# Allegro board lgm_p1_20170524.brd
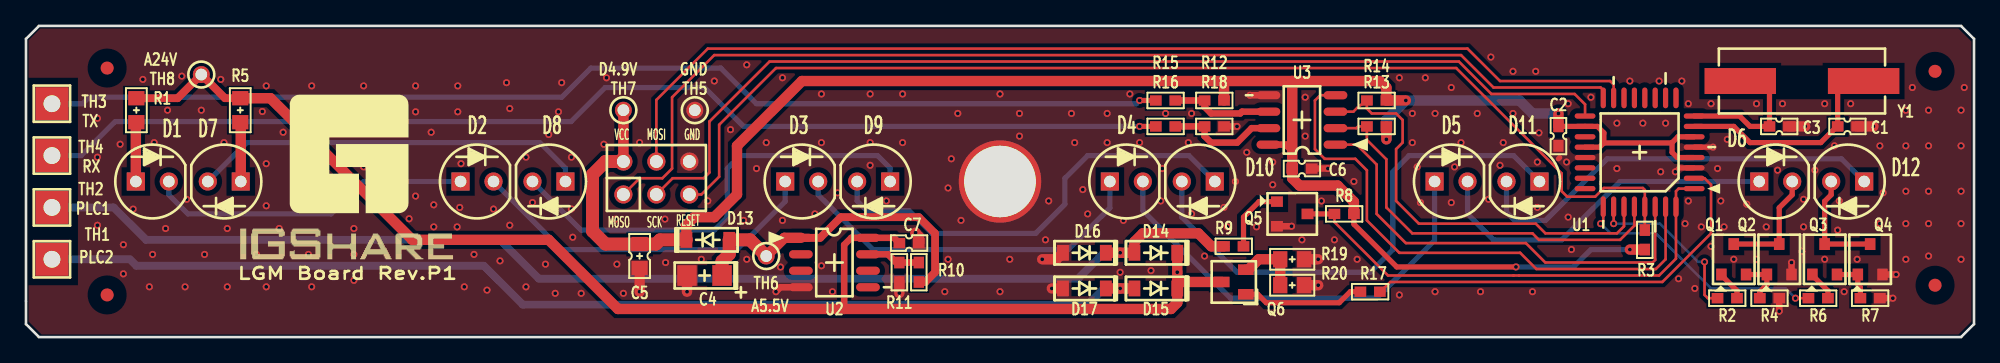
[diagram p0: board, top side]
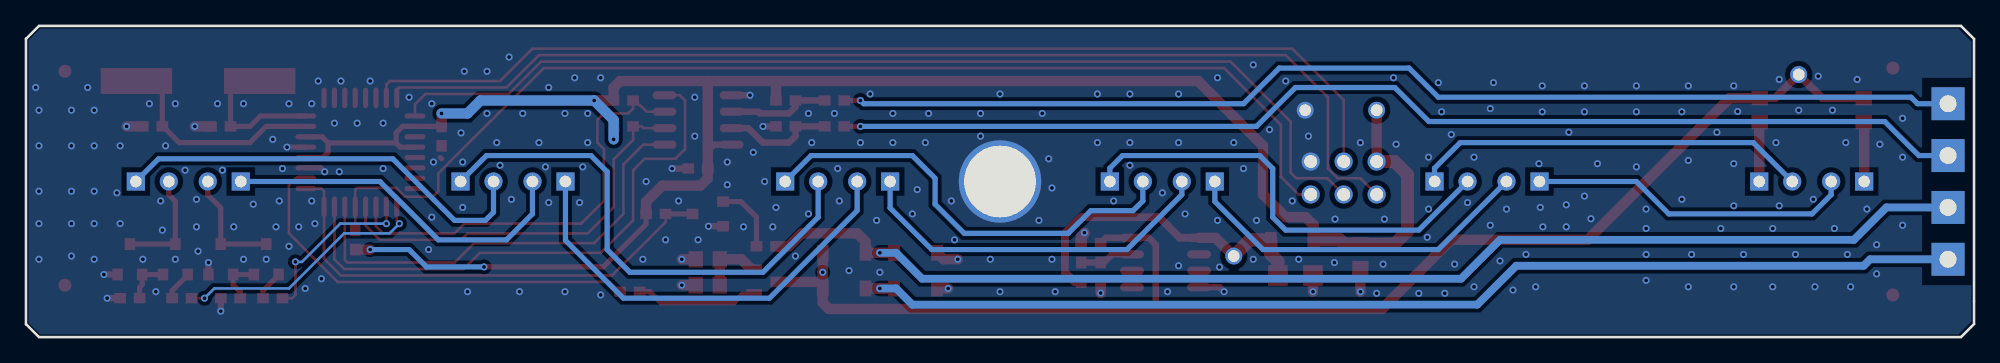
[diagram p1: board, bottom side, seen from below]

Outline 150 x 24 mm; copper layers: TOP, BOTTOM. Coordinates in mm from the lower left corner of the outline.
Outline path: 0,23 0,1 1,0 149,0 150,1 150,23 149,24 1,24 0,23

## Placement (name value [footprint] x y rotation side)
C1  15pF  [CC1608]  140.25 16.25 0 top
C2  100nF  [CC1608]  118 15.5 90 top
C3  15pF  [CC1608]  135 16.25 0 top
C4  TCSCS1C685MAAR  [TC3216]  52.25 4.75 180 top
C5  2.2uF  [CC2012]  47.25 6.25 90 top
C6  100nF  [CC1608]  98.25 13 180 top
C7  680nF  [CC1608]  68 7.25 180 top
D1  T05RC07  [LED_5MM]  11 12 90 top
D2  T05RC07  [LED_5MM]  36 12 90 top
D3  T05RC07  [LED_5MM]  61 12 90 top
D4  T05RC07  [LED_5MM]  86 12 90 top
D5  T05RC07  [LED_5MM]  111 12 90 top
D6  T05RC07  [LED_5MM]  136 12 90 top
D7  T05GC03  [LED_5MM]  14 12 270 top
D8  T05GC03  [LED_5MM]  39 12 270 top
D9  T05GC03  [LED_5MM]  64 12 270 top
D10  T05GC03  [LED_5MM]  89 12 270 top
D11  T05GC03  [LED_5MM]  114 12 270 top
D12  T05GC03  [LED_5MM]  139 12 270 top
D13  MMSD4148T1G  [SOD-123]  52.5 7.5 180 top
D14  MMSD4148T1G  [SOD-123]  87 6.5 0 top
D15  MMSD4148T1G  [SOD-123]  87 3.75 0 top
D16  MMSD4148T1G  [SOD-123]  81.5 6.5 0 top
D17  MMSD4148T1G  [SOD-123]  81.5 3.75 0 top
H1  PCB_HOLE  [HOLE5_5]  75 12 0 top
J2  2.54mm_2Row_Header  [HEADER2X3_2_54MM]  46 11 0 top
NOREF  -  [unnamed]  147 4 0 top
NOREF#2  -  [#2]  12 -48 0 top
NOREF#3  -  [unnamed]  6.25 20.75 0 top
NOREF#4  -  [#2]  0 0 90 top
NOREF#5  -  [#2]  0 2 0 top
NOREF#6  -  [#2]  16 -23 0 top
NOREF#7  -  [unnamed]  147 20.5 0 top
NOREF#8  -  [unnamed]  6.25 3.25 0 top
NOREF#9  -  [#2]  16.5 6 180 bottom
Q1  MMBT3904  [SOT-23]  131.5 6 0 top
Q2  MMBT3904  [SOT-23]  135 6 0 top
Q3  MMBT3904  [SOT-23]  138.5 6 0 top
Q4  MMBT3904  [SOT-23]  142 6 0 top
Q5  MMBT3904  [SOT-23]  97.5 9.5 270 top
Q6  ZXTN04120HFF_SOT23F  [SOT23F]  93 4.25 90 top
R1  1K  [RC2012]  8.5 17.5 90 top
R2  2.7K  [RC1608]  131 3 0 top
R3  10K  [RC1608]  124.65 7.5 270 top
R4  3K  [RC1608]  134.25 3 180 top
R5  1K  [RC2012]  16.5 17.5 90 top
R6  2.7K  [RC1608]  138 3 0 top
R7  3K  [RC1608]  142 3 180 top
R8  47K  [RC1608]  101.5 9.5 0 top
R9  100K  [RC1608]  93 7 0 top
R10  360K  [RC1608]  68.75 5 270 top
R11  100K  [RC1608]  67.25 5 90 top
R12  4.7K  [RC1608]  91.5 18.25 0 top
R13  4.7K  [RC1608]  104 16.25 0 top
R14  4.7K  [RC1608]  104 18.25 0 top
R15  10  [RC1608]  87.75 18.25 0 top
R16  10  [RC1608]  87.75 16.25 0 top
R17  1K  [RC1608]  103.5 3.5 0 top
R18  4.7K  [RC1608]  91.5 16.25 180 top
R19  15  [RC2012]  97.5 6 180 top
R20  15  [RC2012]  97.5 4 180 top
TH1  TH  [TP_51]  2 6 0 top
TH2  TH  [TP_51]  2 10 0 top
TH3  TH  [TP_51]  2 18 0 top
TH4  TH  [TP_51]  2 14 0 top
TH5  GND  [1PIN-HDR]  51.5 17.5 0 top
TH6  A5.5V  [1PIN-HDR]  57 6.25 0 top
TH7  D4.9V  [1PIN-HDR]  46 17.5 0 top
TH8  A24V  [1PIN-HDR]  13.5 20.25 0 top
U1  ATMEGA48V-10AU  [QFP32_7_9_0_8]  124.25 14.25 180 top
U2  LP2951D  [SOP8_3_9_6_1_27]  62.25 5.75 270 top
U3  SN65176BD/DNI  [SOP8_3_9_6_1_27]  98.25 16.75 90 top
Y1  SX-1(8MHz)  [SX-1]  136.75 19.75 180 top

## Library data of the parts
C1-C3 C6 C7 = _CC1608
C4 = _TC3216
C5 = _CC2012
D1-D12 = _LED_5MM
D13-D17 = _SOD-123
H1 = _HOLE5_5
J2 = _HEADER2X3_2_54MM
Q1-Q5 = _SOT-23
Q6 = _SOT23F
R1 R5 R19 R20 = _RC2012
R2-R4 R6-R18 = _RC1608
TH1-TH4 = _TP_51
TH5-TH8 = _1PIN-HDR
U1 = _QFP32_7_9_0_8
U2 U3 = _SOP8_3_9_6_1_27
Y1 = _SX-1

## Footprints (pads in the part's own frame, mm; a bottom-side part is the same pattern mirrored in y, then rotated)
1PIN-HDR
  round 1.3 hole 0.9: 1(0,0)
CC1608
  rect 0.9x0.8 smd: 1(-0.75,0) 2(0.75,0)
CC2012
  rect 1.1x1.25 smd: 1(-0.925,0) 2(0.925,0)
HEADER2X3_2_54MM
  round 1.397 hole 0.991: 1(0,0) 2(0,2.54) 3(2.54,0) 4(2.54,2.54) 5(5.08,0) 6(5.08,2.54)
HOLE5_5
  round 6.35 hole 5.512: 1(0,0)
LED_5MM
  rect 1.397x1.397 hole 0.889: 1(0,2.54)
  round 1.397 hole 0.889: 2(0,0)
QFP32_7_9_0_8
  oval 1.6x0.4 smd: 1(-4.2,2.8) 2(-4.2,2) 3(-4.2,1.2) 4(-4.2,0.4) 5(-4.2,-0.4) 6(-4.2,-1.2) 7(-4.2,-2) 8(-4.2,-2.8) 17(4.2,-2.8) 18(4.2,-2) 19(4.2,-1.2) 20(4.2,-0.4) 21(4.2,0.4) 22(4.2,1.2) 23(4.2,2) 24(4.2,2.8)
  oval 0.4x1.6 smd: 9(-2.8,-4.2) 10(-2,-4.2) 11(-1.2,-4.2) 12(-0.4,-4.2) 13(0.4,-4.2) 14(1.2,-4.2) 15(2,-4.2) 16(2.8,-4.2) 25(2.8,4.2) 26(2,4.2) 27(1.2,4.2) 28(0.4,4.2) 29(-0.4,4.2) 30(-1.2,4.2) 31(-2,4.2) 32(-2.8,4.2)
RC1608
  rect 0.9x0.8 smd: 1(-0.75,0) 2(0.75,0)
RC2012
  rect 1.1x1.25 smd: 1(-0.925,0) 2(0.925,0)
SOD-123
  rect 0.91x1.22 smd: 1(1.65,0) 2(-1.65,0)
SOP8_3_9_6_1_27
  oval 0.635x1.829 smd: 1(-1.905,-2.583) 2(-0.635,-2.583) 3(0.635,-2.583) 4(1.905,-2.583) 5(1.905,2.583) 6(0.635,2.583) 7(-0.635,2.583) 8(-1.905,2.583)
SOT23F
  rect 0.813x1.194 smd: 1(-0.95,-0.925) 2(0.95,-0.925) 3(0,0.925)
SOT-23
  rect 0.813x0.914 smd: 1(-0.95,-1.175) 2(0.95,-1.175) 3(0,1.175)
SX-1
  rect 5.5x2 smd: 1(-4.75,0) 2(4.75,0)
TC3216
  rect 1.5x1.6 smd: 1(-1.35,0) 2(1.35,0)
TP_51
  rect 2.54x2.54 hole 1.295: 1(0,0)
unnamed
  round 1 smd: (0,0)

## Nets
A5.5V: C4.1 D13.2 R10.2 TH6.1 U2.1
A24V: C7.2 D14.1 D15.1 Q6.3 R1.2 R5.2 TH8.1 U2.8
D4.9V: C2.2 C5.2 C6.2 D13.1 J2.2 R3.2 R8.2 R12.2 R13.2 R14.2 TH7.1 U1.4 U1.6 U1.18 U1.20 U3.8
GND: C1.2 C2.1 C3.2 C4.2 C5.1 C6.1 C7.1 D16.2 D17.2 H1.1 J2.6 Q2.2 Q4.2 Q5.2 R4.1 R7.1 R11.1 R18.1 R19.1 R20.1 TH5.1 U1.3 U1.5 U1.21 U2.4 U3.5
485_DE_EN: R14.1 U1.27 U3.3
485_RE_EN: R13.1 U1.28 U3.2
485_RX: R16.1 TH4.1
485_RXD: U1.30 U3.1
485_TX: R15.1 TH3.1
485_TXD: U1.31 U3.4
LED_GREEN: R6.1 U1.25
LED_RED: R2.1 U1.26
MISO: J2.1 U1.16
MOSI: J2.4 U1.15
PLC1: D14.2 D16.1 R9.1 TH2.1
PLC2: D15.2 D17.1 TH1.1
PLC_RX: Q5.3 R8.1 U1.1 U1.32
PLC_TX: R17.2 U1.2
RESET: J2.5 R3.1 U1.29
N00430: Q6.1 R17.1
N00485: Q6.2 R19.2 R20.2
N00882: R10.1 R11.2 U2.7
N16711905: Q5.1 R9.2
N16712688: R12.1 R15.2 U3.6
N16712703: R16.2 R18.2 U3.7
N16713814: J2.3 U1.17
N16714271: C3.1 U1.8 Y1.2
N16714295: C1.1 U1.7 Y1.1
N16737449: D12.2 Q3.3 Q4.3
N16737453: Q3.2 Q4.1 R7.2
N16737473: Q3.1 R6.2
N16737509: D1.1 R1.1
N16737521: D1.2 D2.1
N16737525: D2.2 D3.1
N16737529: D3.2 D4.1
N16737533: D4.2 D5.1
N16738584: D6.2 Q1.3 Q2.3
N16738588: Q1.2 Q2.1 R4.2
N16738608: Q1.1 R2.2
N16738824: D5.2 D6.1
N16739311: D7.1 R5.1
N16739323: D7.2 D8.1
N16739327: D8.2 D9.1
N16739331: D9.2 D10.1
N16739335: D10.2 D11.1
N16739734: D11.2 D12.1

Pads without a net: U1 9 10 11 12 13 14 19 22 23 24; U2 2 3 5 6

## Via types
v1: diameter 0.55, hole 0.3, TOP to BOTTOM, 280 vias

## Routing (per net, layer and track width the routed paths; a pad name or vN(x,y) marks a point on that pad's centre or on a via; arc(x,y) is an arc through that point)
A5.5V: length 25.7
  TOP w0.6: R10.2 69.25,4.25 70,5 70,8 68.75,9.25 62.75,9.25 61.16,7.66 U2.1
  TOP w0.8: TH6.1 58.41,7.66 U2.1
  TOP w1: C4.1 53.6,5.85 54.15,6.4 D13.2 55.75,7.5 TH6.1
A24V: length 105.6
  TOP w0.5: C7.2 66.84,7.66 U2.8 63.54,7.66 63,7.11 63,2.17
  TOP w0.6: R5.2 15.32,18.43 TH8.1 11.68,18.43 R1.2
  TOP w0.8: R5.2 18.82,18.43 29.75,7.5 40.25,7.5 45.58,2.17 88.17,2.17 88.65,2.65 D15.1 88.65,4.5 ; D14.1 v1(88.65,5) 88.65,4.5 ; 88.65,4.5 88.9,4.25 Q6.3
D4.9V: length 159.6
  TOP w0.4: v1(114.73,5.41) 105.55,5.41 102.25,8.71 R8.2 ; 126.75,15 126.72,14.97 121.5,14.97 ; 126.75,15 126.75,14.25 127.15,13.85 U1.4 ; 126.75,15 127.2,15.45 U1.6 ; 121.5,14.97 121.18,14.65 U1.20 ; 121.5,14.97 121.5,15.75 121,16.25 U1.18 C2.2
  TOP w0.5: 97.5,14.35 97,14.85 U3.8
  TOP w0.8: 92.25,19.75 97.5,19.75 ; 92.25,19.75 R12.2 ; 92.25,19.75 59.75,19.75 54.75,14.75 54.75,11 53,9.25 51.46,9.25 50.85,8.64 D13.1 ; 97.5,19.75 C6.2 97.5,12.25 98.07,11.68 101,11.68 102.25,10.43 R8.2 ; 97.5,19.75 104.25,19.75 104.75,19.25 R14.2 v1(106.25,18.25) ; R13.2 v1(104.75,15.25) ; C2.2 v1(118,17.25) ; J2.2 TH7.1 ; R3.2 v1(123.5,6.75)
  TOP w1: D13.1 48.83,7.5 48.5,7.17 C5.2 44.62,7.17 43.62,8.18 43.62,12.54 44.62,13.54 J2.2
  BOTTOM w0.4: v1(114.73,5.41) 119.16,5.41 120.5,6.75 v1(123.5,6.75)
  BOTTOM w0.8: v1(118,17.25) 116,17.25 115,18.25 v1(106.25,18.25) 104.75,16.75 v1(104.75,15.25)
GND: length 26.1
  TOP w0.4: v1(127,12.75) 127.3,13.05 U1.3 ; 118.1,13.85 118,13.75 ; U1.5 v1(129.9,14.65)
  TOP w0.5: C6.1 v1(100.25,13) ; Q2.2 v1(135.95,5.75) ; Q5.2 v1(97.45,8.55) ; U3.5 v1(94.25,18.66) ; R18.1 v1(93.25,16.25) ; R4.1 v1(135,2) ; U2.4 58.09,3.85 v1(57.75,3.5) ; Q4.2 v1(144,4.83) ; R7.1 v1(143.75,3)
  TOP w0.8: C3.2 v1(137,16.25) ; R20.1 v1(99.5,4) ; R11.1 v1(67.25,3.4) ; C1.2 v1(142.25,16.25) ; C5.1 v1(47.25,3.5) ; v1(78.25,6) 79.35,6 D16.2 ; C4.2 v1(50.9,3.5) ; v1(68.5,8.05) 68.5,8 68.75,7.75 C7.1 ; D17.2 v1(78.99,3.75) ; R19.1 v1(99.5,6)
  vias: v1(5.5,16.88) v1(5.5,13.88) v1(5.5,8.62) v1(7.25,14.88) v1(7.5,7.12) v1(7.5,4.88) v1(8.25,9.88) v1(9,19.88) v1(9.5,3.88) v1(9.75,6.38) v1(9.88,15) v1(10.75,8.38) v1(10.9,17.5) v1(12,20.12) v1(12.25,3.88) v1(12.38,10.62) v1(13.5,17.5) v1(13.75,6.38) v1(15,19.88) v1(15,10.12) v1(15.25,15) v1(15.5,8.38) v1(15.5,3.88) v1(17.75,6.38) v1(18.2,17.4) v1(18.5,19.38) v1(18.5,13.38) v1(18.5,10.12) v1(18.5,3.88) v1(19.5,8.38) v1(19.8,15.8) v1(21.75,6.38) v1(22,19.38) v1(22,13.62) v1(22,3.88) v1(22.5,17.38) v1(22.5,10.62) v1(25.25,9.88) v1(25.25,8.38) v1(25.25,6.38) v1(25.25,4.38) v1(26,19.38) v1(26,17.38) v1(26,13.12) v1(29,13.38) v1(29.5,9.12) v1(30,19.38) v1(30,17.38) v1(30,10.88) v1(31.2,15.8) v1(31.4,10.2) v1(31.4,8.5) v1(33.25,19.38) v1(33.25,17.38) v1(33.2,8.5) v1(33.4,10) v1(33.5,13.38) v1(33.75,3.88) v1(34.5,6.38) v1(35.5,3.62) v1(36,9.88) v1(36.5,5.88) v1(37,19.62) v1(37.25,17.62) v1(37.25,8.62) v1(38.5,13.88) v1(38.5,3.88) v1(39,10.38) v1(40,5.62) v1(40.25,15.62) v1(40.75,3.38) v1(41,17.38) v1(41.25,19.62) v1(42,13.88) v1(42,9.88) v1(42.1,7.7) v1(42.75,3.38) v1(44.5,14.88) v1(44.7,20) v1(45.4,9.1) v1(45.5,5.62) v1(46,3.38) v1(47.25,15) v1(49.2,9.1) v1(49.25,5.75) v1(51.25,15.5) v1(52,6) v1(52.5,10.5) v1(53,19.75) v1(54.25,16) v1(55.25,9) v1(55.5,21) v1(55.5,6) v1(56.25,13) v1(57,15) v1(58.1,5.4) v1(58.25,20) v1(58.25,9) v1(60.75,9.5) v1(61.25,18.75) v1(61.25,15) v1(61.25,5.5) v1(62.1,3.5) v1(62.5,11.12) v1(65,18.75) v1(65,15) v1(65,13.25) v1(66.25,10.5) v1(67.5,18.75) v1(67.5,15) v1(70.75,3.5) v1(71,11.5) v1(71,6) v1(71.25,13.75) v1(71.75,17.25) v1(72,9) v1(75,18.75) v1(75,3.5) v1(75.75,6) v1(76.5,17.25) v1(76.5,15.5) v1(78.5,7.5) v1(78.75,10.5) v1(80.5,17.25) v1(80.75,15) v1(81.38,11.38) v1(81.75,9.5) v1(83.25,17.25) v1(83.25,15) v1(84.25,5) v1(84.5,9) v1(85,18.75) v1(85.75,15) v1(86.62,5.12) v1(87.38,10.5) v1(87.5,13) v1(87.75,17.25) v1(89.5,15) v1(89.75,17.25) v1(89.75,9.5) v1(90.75,6.25) v1(92.25,10) v1(92.5,8.5) v1(93.12,12) v1(94,14.25) v1(94.75,8.5) v1(96,13.5) v1(96,11.75) v1(98.25,7.5) v1(98.5,18.5) v1(98.5,15.5) v1(99.75,10.5) v1(100.75,7.5) v1(102.25,12) v1(102.5,6) v1(105.75,20) v1(105.75,3.25) v1(106.75,17.25) v1(106.75,15) v1(107.12,13.12) v1(107.38,10.38) v1(107.75,20) v1(108.5,17.25) v1(108.5,3.5) v1(109.75,19.25) v1(109.75,10.38) v1(110,13.12) v1(110.5,15) v1(111.75,17.25) v1(112,3.5) v1(112.62,10.62) v1(112.8,21.6) v1(113.5,13.25) v1(113.75,15) v1(114.5,20.5) v1(114.5,17.25) v1(116,3.5) v1(116.25,20.5) v1(116.38,13.5) v1(116.38,10) v1(116.5,15.75) v1(118.62,13.5) v1(118.75,18) v1(118.75,9.25) v1(119,6.75) v1(120.5,18.5) v1(122.5,16.5) v1(122.5,13) v1(123.5,19.75) v1(124.5,16.5) v1(125.75,19.75) v1(125.88,12.75) v1(126.25,16.5) v1(127.25,4.5) v1(127.5,19.75) v1(127.75,8.75) v1(128,18) v1(128,10.5) v1(128.5,3.75) v1(129,8.5) v1(129.75,18) v1(129.75,7) v1(130.25,13) v1(130.5,10.5) v1(130.75,8.5) v1(131,15.25) v1(131.5,6) v1(132.5,10.25) v1(133.25,18) v1(133.25,6) v1(134,8.5) v1(134.88,12.88) v1(135.25,18) v1(136.75,6.62) v1(136.88,10.62) v1(136.88,8.5) v1(137.75,12.88) v1(138.5,18) v1(138.5,6) v1(139.25,14.75) v1(139.5,8.25) v1(139.62,10.5) v1(140,3.5) v1(140.5,18) v1(141,6) v1(142.75,14.75) v1(142.75,8.75) v1(143,11.12) v1(144.75,17.5) v1(144.75,14.75) v1(144.75,11.25) v1(144.75,8.75) v1(144.75,6) v1(145.25,19.25) v1(146.5,17.5) v1(146.5,14.75) v1(146.5,11.25) v1(146.5,8.75) v1(146.5,6.25) v1(149,17.5) v1(149,14.75) v1(149,11.25) v1(149,8.75) v1(149,6) v1(149.25,19.25)
485_DE_EN: length 33.2
  TOP w0.2: U3.3 102.21,17.39 102.57,17.75 R14.1 103.25,17.62 103.62,17.25 105.5,17.25 106,16.75 106,15 105.5,14.5 105.5,10.5 107.25,8.75 116.25,8.75 117,8 122.5,8 123.05,8.55 U1.27
485_RE_EN: length 31.4
  TOP w0.2: U3.2 102.44,16.11 102.57,16.25 R13.1 103.25,15.21 104.75,13.71 104.75,10 106.75,8 116,8 116.5,7.5 122.75,7.5 123.85,8.6 U1.28
485_RX: length 88.4
  TOP w0.4: R16.1 v1(85.75,16.25)
  BOTTOM w0.4: TH4.1 4.25,14 6.88,16.63 41.98,16.63 44.6,19.25 52.25,19.25 55.25,16.25 v1(85.75,16.25)
485_RXD: length 34.8
  TOP w0.2: U1.30 125.45,5.95 125.25,5.75 116.99,5.75 115.49,7.25 106.25,7.25 104,9.5 104,13.31 102.47,14.85 U3.1
485_TX: length 87.4
  TOP w0.4: R15.1 v1(85.75,18.25)
  BOTTOM w0.4: v1(85.75,18.25) 85.5,18 56.25,18 53.5,20.75 43.5,20.75 41.25,18.5 4.85,18.5 4.35,18 TH3.1
485_TXD: length 43
  TOP w0.2: U1.31 126.25,6 125.5,5.25 116.3,5.25 115.05,6.5 105.75,6.5 103.25,9 103.25,12.86 102.36,13.75 100,13.75 99.25,14.5 99.25,18.25 99.66,18.66 U3.4
LED_GREEN: length 19.8
  TOP w0.2: v1(121.25,8.75) 121.45,8.95 U1.25 ; v1(136.25,3) R6.1
  BOTTOM w0.2: v1(121.25,8.75) 122,8 125.5,8 129.75,3.75 135.5,3.75 v1(136.25,3)
LED_RED: length 13.2
  TOP w0.2: U1.26 v1(122.25,8.75) ; v1(129.25,5.8) 129.25,3.25 129.5,3 R2.1
  BOTTOM w0.2: v1(122.25,8.75) 125.8,8.75 128.75,5.8 v1(129.25,5.8)
MISO: length 84.8
  TOP w0.2: J2.1 47.25,12.25 49,12.25 49.75,13 49.75,18.5 53,21.75 110.5,21.75 113,19.25 121.25,19.25 121.45,19.05 U1.16
MOSI: length 82.3
  TOP w0.2: J2.4 48.54,18.29 52.5,22.25 111,22.25 113.5,19.75 121.98,19.75 122.25,19.48 U1.15
PLC1: length 96
  TOP w0.8: R9.1 91.27,7 90.27,8 86,8 85.35,7.35 D14.2 v1(84.25,6.5) D16.1
  BOTTOM w0.6: v1(84.25,6.5) 83,6.5 81,4.5 39.5,4.5 36.5,7.5 9.25,7.5 6.75,10 TH2.1
PLC2: length 86.4
  TOP w0.8: D15.2 v1(84.25,3.75) D17.1
  BOTTOM w0.6: v1(84.25,3.75) 83,3.75 81.75,2.5 38.25,2.5 35.25,5.5 8.5,5.5 8,6 TH1.1
PLC_RX: length 37.9
  TOP w0.2: U1.1 127.25,11.45 127.05,11.25 U1.32 127.05,6.05 125.75,4.75 114.96,4.75 114.96,4.75 114.54,4.75 114.54,4.75 104.87,4.75 100.75,8.87 R8.1
  TOP w0.4: Q5.3 R8.1
PLC_TX: length 32.6
  TOP w0.2: U1.2 129.25,12.25 129.75,11.75 129.75,8 126,4.25 105.05,4.25 104.3,3.5 R17.2
RESET: length 88.3
  TOP w0.2: R3.1 U1.29 124.65,11.35 124.5,11.5 121.5,11.5 120.83,10.83 118.67,10.83 118.25,11.25 118.25,12.62 110.12,20.75 57.75,20.75 53.38,16.38 53.38,12.37 52.01,11 J2.5
N00430: length 9.4
  TOP w0.4: R17.1 101.97,3.5 101.12,2.65 95.5,2.65 94.85,3.3 Q6.1
N00485: length 5
  TOP w0.8: R20.2 R19.2 94.92,6 94.12,5.2 Q6.2
N00882: length 4.2
  TOP w0.5: U2.7 66.36,6.38 67,5.75 R11.2 R10.1
N16711905: length 5.3
  TOP w0.4: R9.2 93.75,9.25 94.95,10.45 Q5.1
N16712688: length 7.9
  TOP w0.5: R15.2 R12.1 90.75,17.75 91.25,17.25 93.5,17.25 93.64,17.39 U3.6
N16712703: length 8.6
  TOP w0.5: R16.2 R18.2 90.75,15.5 91.25,15 93.26,15 94.38,16.11 U3.7
N16713814: length 80.3
  TOP w0.2: J2.3 49.79,12.25 52.19,12.25 52.62,12.69 52.62,16.62 57.25,21.25 110.34,21.25 112.84,18.75 119.25,18.75 120.05,17.95 U1.17
N16714271: length 11.4
  TOP w0.4: Y1.2 133.5,19.75 134.25,19 C3.1 132.75,16.25 131.95,17.05 U1.8
N16714295: length 17.3
  TOP w0.4: Y1.1 140,19.75 139.5,19.25 C1.1 139.45,16.25 138.2,15 132.75,15 131.5,16.25 U1.7
N16737449: length 8.5
  TOP w0.4: Q4.3 Q3.3 138.5,10.47 139,10.97 D12.2
N16737453: length 3.5
  TOP w0.4: R7.2 141.25,3.84 141.05,4.04 Q4.1 Q3.2
N16737473: length 2.3
  TOP w0.4: Q3.1 137.55,4.77 138.75,3.57 R6.2
N16737509: length 4.6
  TOP w0.8: R1.1 8.46,16.54 D1.1
N16737521: length 25.1
  BOTTOM w0.4: D1.2 11,10.97 12.47,9.5 23.5,9.5 26,12 D2.1
N16737525: length 27.7
  BOTTOM w0.4: D2.2 41.25,6.75 54.75,6.75 58.46,10.46 D3.1
N16737529: length 28.6
  BOTTOM w0.4: D4.1 83.46,9.96 80.25,6.75 65.22,6.75 61,10.97 D3.2
N16737533: length 33.9
  BOTTOM w0.4: D5.1 108.46,7.46 104,3 92.75,3 86,9.75 D4.2
N16738584: length 8.7
  TOP w0.4: D6.2 136,10.97 135,9.97 Q2.3 Q1.3
N16738588: length 3.7
  TOP w0.4: Q1.2 Q2.1 134.05,4.04 133.5,3.49 R4.2
N16738608: length 2.3
  TOP w0.4: R2.2 131.75,3.57 130.55,4.77 Q1.1
N16738824: length 27.7
  BOTTOM w0.4: D5.2 111,9.5 113,7.5 118.25,7.5 122.75,12 D6.1
N16739311: length 4.6
  TOP w0.8: R5.1 16.54,16.54 D7.1
N16739323: length 30.6
  BOTTOM w0.4: D8.1 41.54,13.03 39.57,15 17,15 D7.2
N16739327: length 35.1
  BOTTOM w0.4: D9.1 66.54,13.03 65.57,14 55,14 54,13 54,9.25 53,8.25 42.75,8.25 D8.2
N16739331: length 34.6
  BOTTOM w0.4: D9.2 64,10.5 64.75,9.75 68,9.75 69.75,8 77.75,8 80,10.25 80,12.25 81.75,14 89.54,14 D10.1
N16739335: length 40.1
  BOTTOM w0.4: D11.1 114.54,14 106.5,14 105.25,12.75 105.25,6.75 103.5,5 93.25,5 89,9.25 D10.2
N16739734: length 32.9
  BOTTOM w0.4: D12.1 139.79,13.75 121.75,13.75 117,9 114.62,9 114,9.62 D11.2

## Copper pours and planes (outline as drawn; the poured copper is in the pictures)
GND on TOP: 1.2,0.2 0.2,1.2 0.2,4 4,4 4,20 0.2,20 0.2,22.9 1.1,23.8 148.8,23.8 149.8,22.8 149.8,1.2 148.8,0.2 ; 5 cut-outs
GND on BOTTOM: 1.2,0.2 0.2,1.2 0.2,4 4,4 4,20 0.2,20 0.2,22.8 1.2,23.8 148.9,23.8 149.8,22.9 149.8,1.1 148.9,0.2

## Text on the board
Ref Des/Silkscreen Top: MOSO | VCC | MOSI | SCK | RESET | GND | PLC1 | PLC2 | TX | RX | A24V | D4.9V | A5.5V
User.19: FIGURE | SIZE | 0.30 | 0.89 | 0.90 | 0.99 | 1.30 | 5.51 | DRILL CHART: TOP to BOTTOM | ALL UNITS ARE IN MILLIMETERS | PLATED | QTY | 280 | 24 | 4 | 6 | 1
